# Altium PCB LowerMachine.PcbDoc
Units mil, origin at the board's own origin, x right, y up, seen from the top; angles counter-clockwise.
Board outline 1968.5 x 1968.5 mil, 2 copper layers (Top Layer, Bottom Layer); 46 components, 59 nets, 207 pads, 48 vias.
Unrouted connection lines stored in the file: 39.
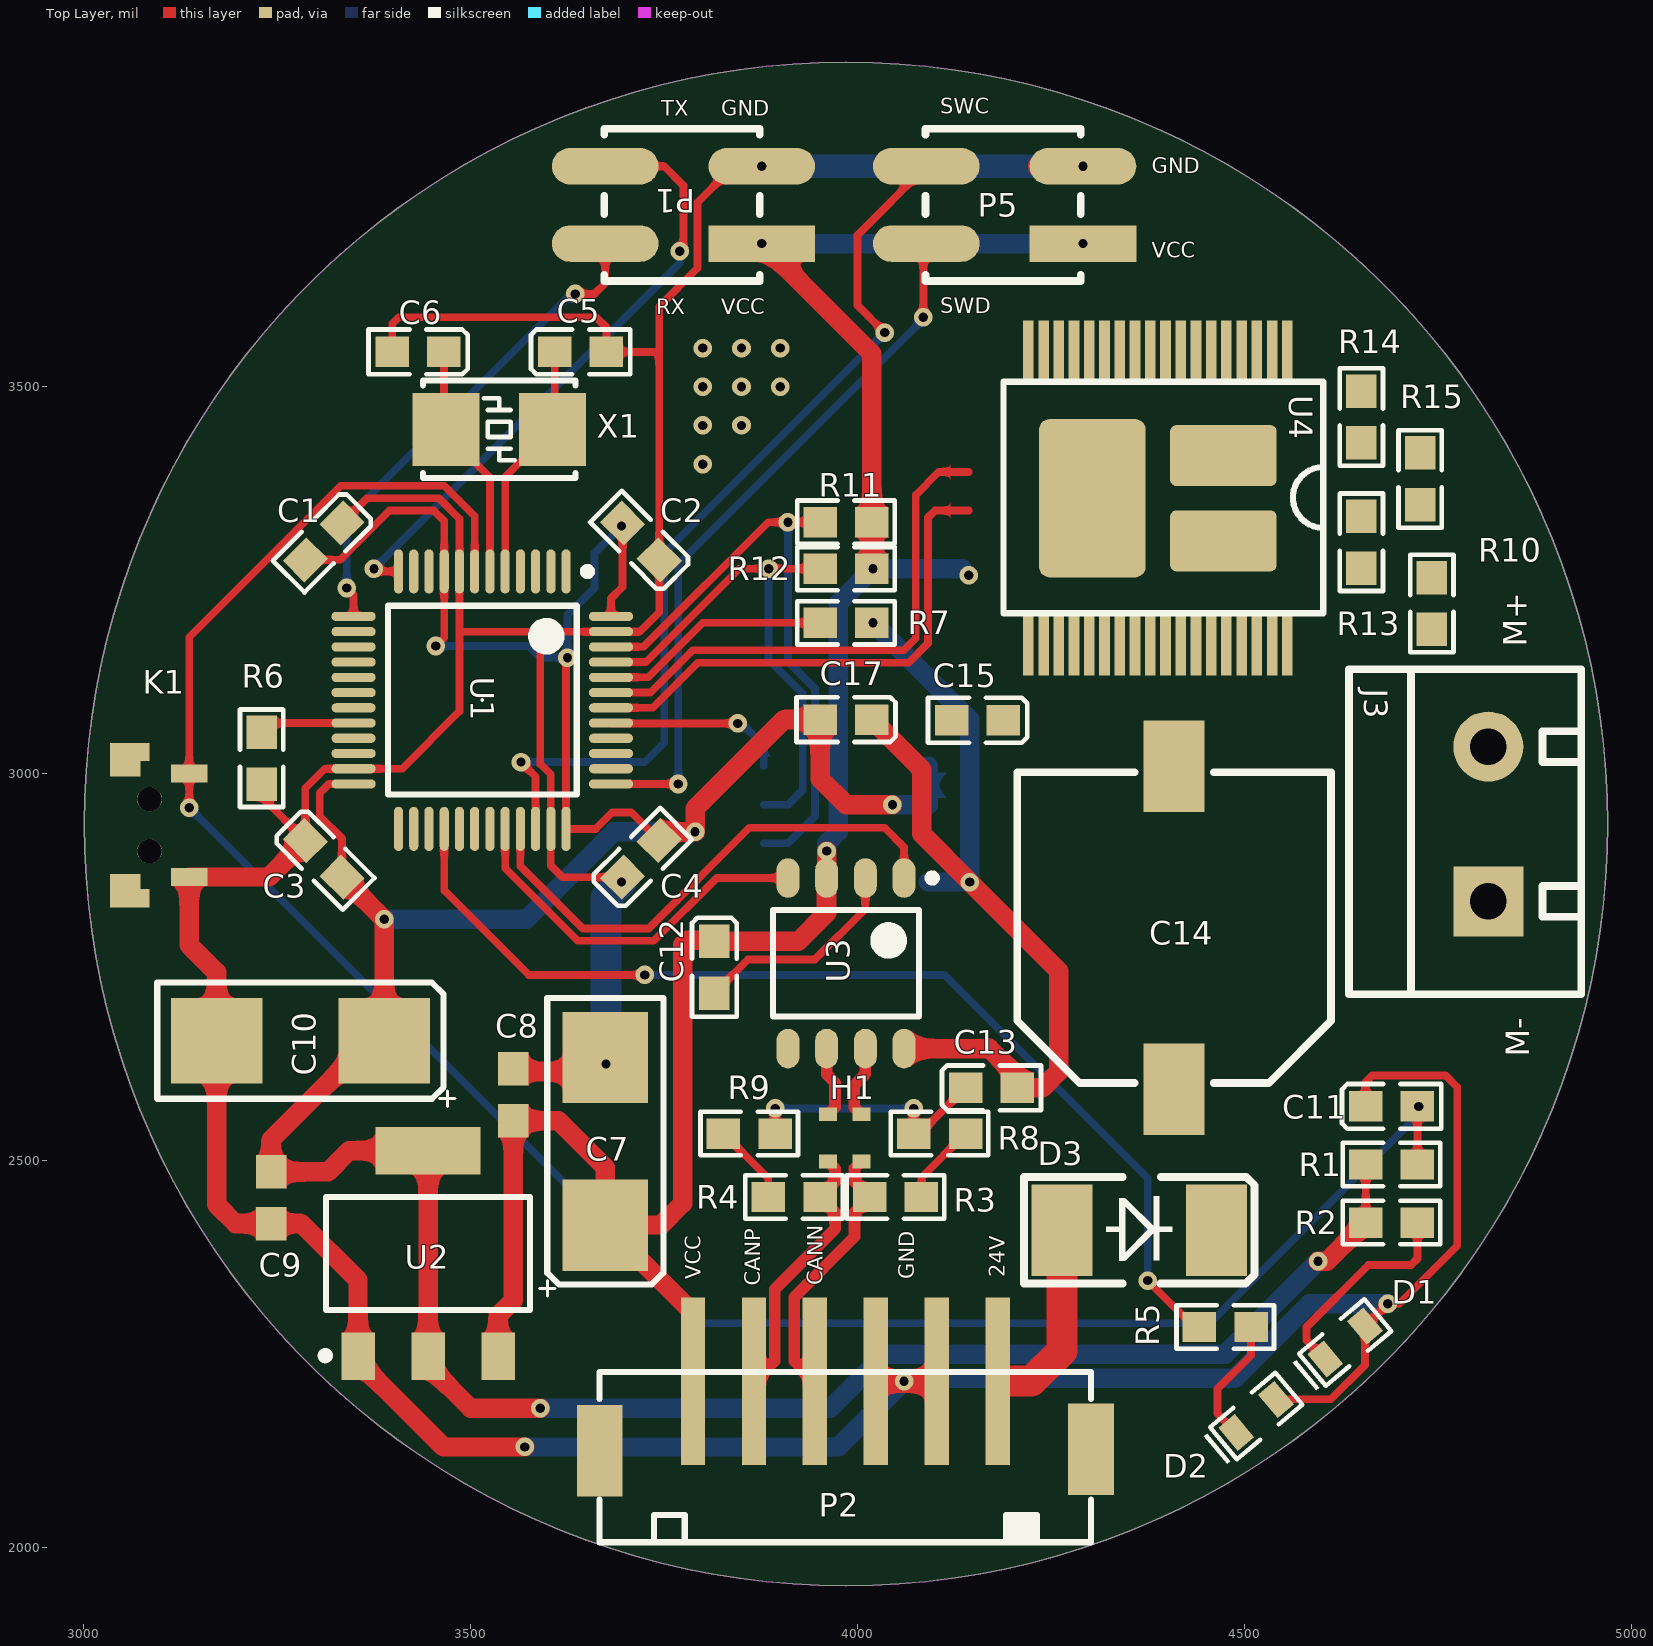
[diagram p0: Top Layer view]
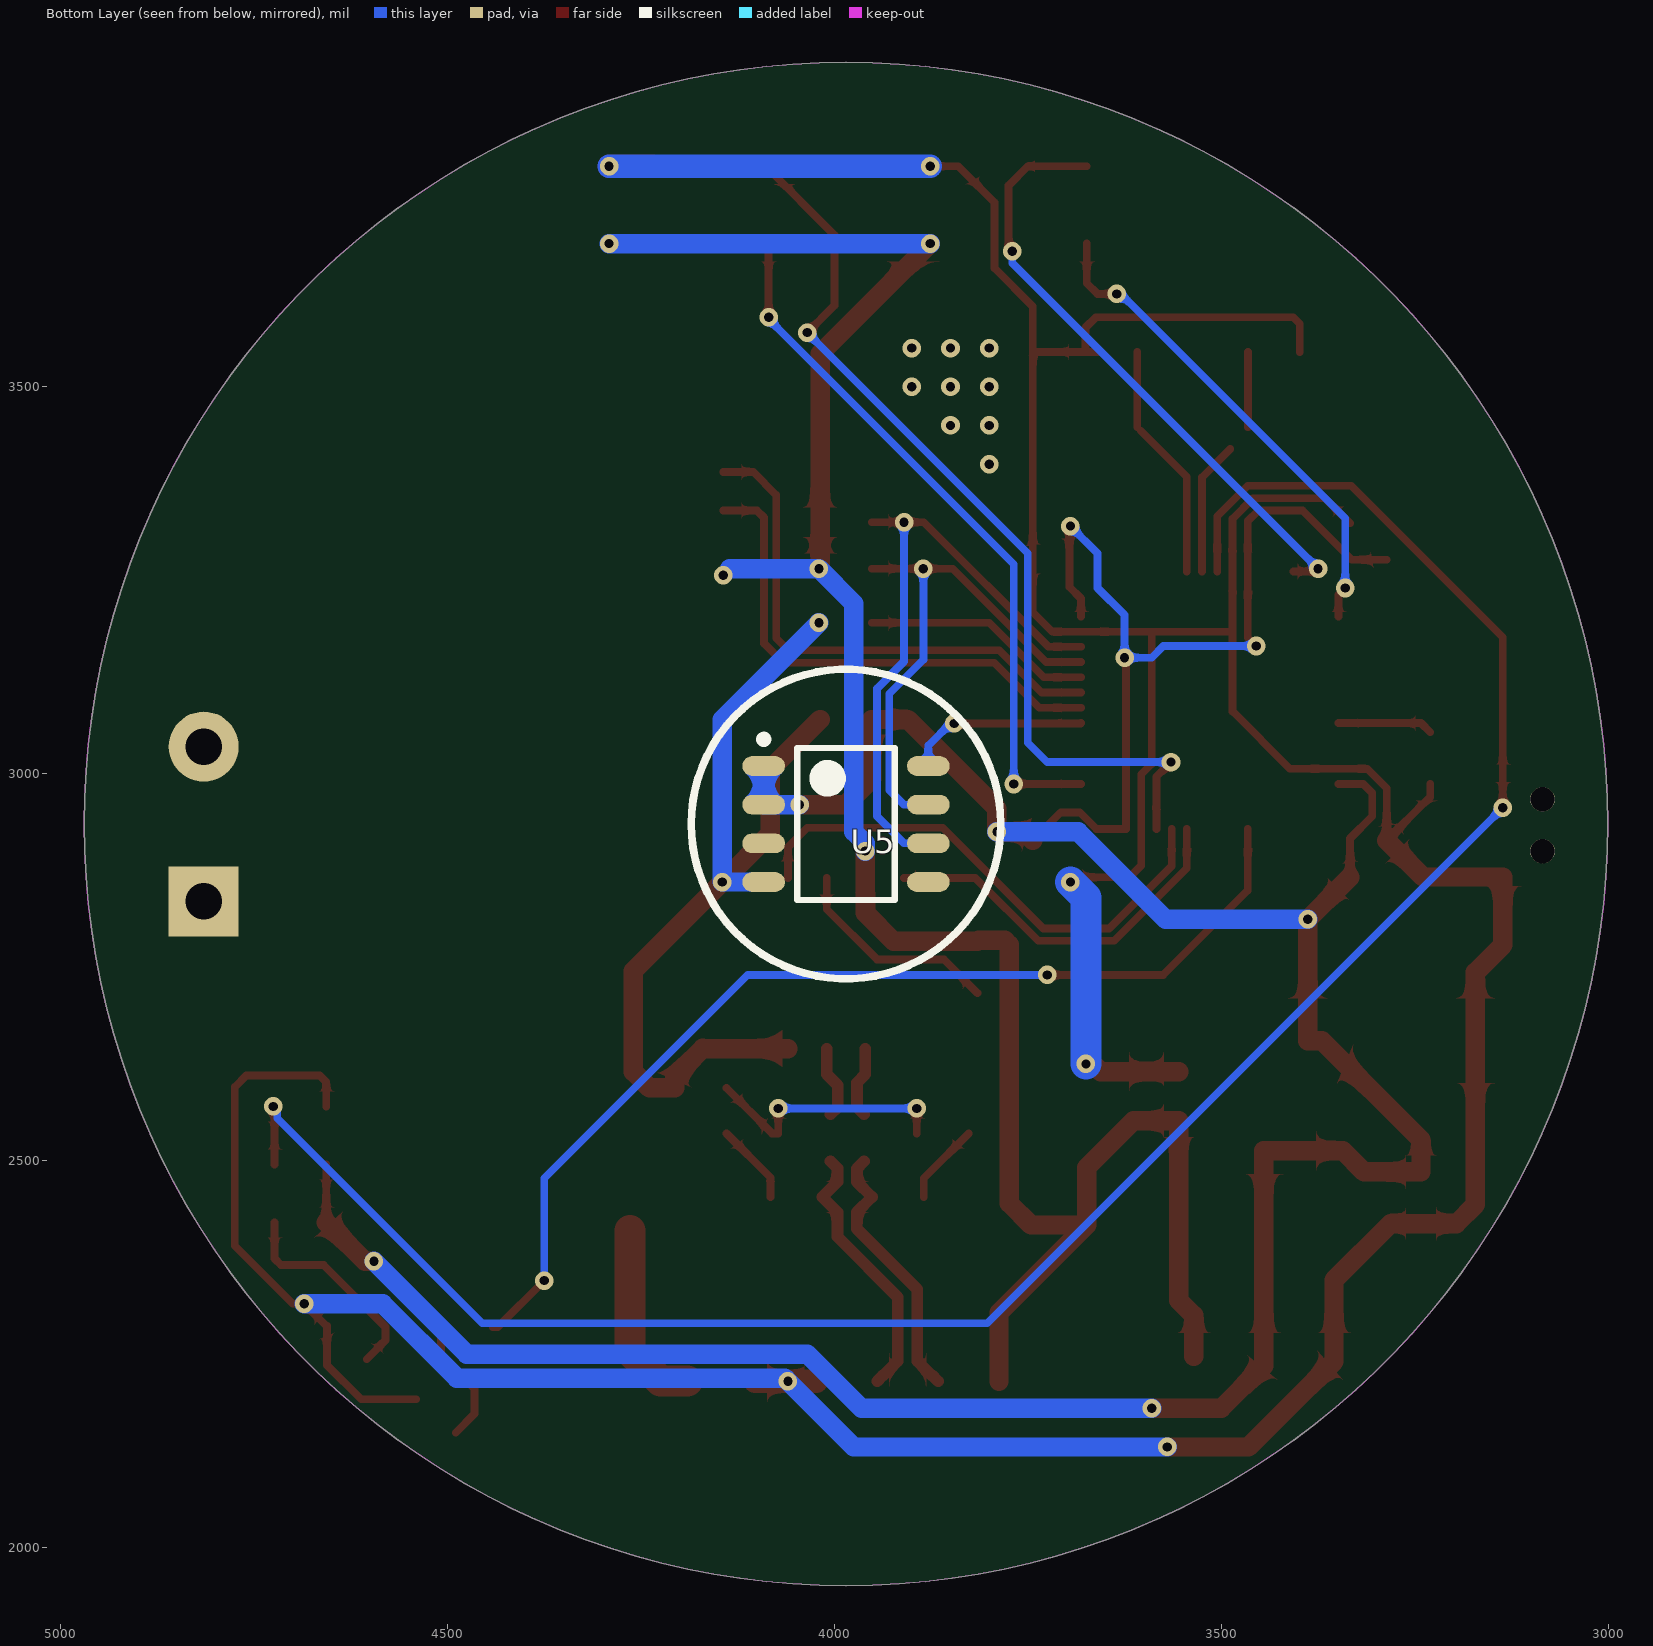
[diagram p1: Bottom Layer view, seen from below]

## Layer stack, top to bottom
Top Solder: solder mask 0.4, Solder Resist, Dk 3.5
Top Layer: signal copper 1.4
Dielectric 1: dielectric 12.6, FR-4, Dk 4.8
Bottom Layer: signal copper 1.4
Bottom Solder: solder mask 0.4, Solder Resist, Dk 3.5

## Board outline
3000.75,2935 ccw(c3985,2935) 3985,1950.75 ccw(c3985,2935) 4969.25,2935 ccw(c3985,2935) 3985,3919.25 ccw(c3985,2935)

## Design rules (kind name [scope] priority, off if disabled: settings)
Clearance [All] p1: gap=5
DiffPairsRouting [All] p1: maxlimit=10 minlimit=10 mostfreqgap=10 toplayer_minwidth=15 toplayer_maxwidth=15 toplayer_prefwidth=15 bottomlayer_minwidth=15 bottomlayer_maxwidth=15 bottomlayer_prefwidth=15 maxuncoupledlength=500
PolygonConnect [All] p1: connectstyle=Relief reliefconductorwidth=10 reliefentries=4 polygonreliefangle="90 Angle" airgapwidth=10
RoutingVias [All] p1: holewidth=28 width=50 viastyle="Through Hole" minholewidth=28 minwidth=50 maxholewidth=28 maxwidth=50
SolderMaskExpansion [All] p1: expansion=4
Width [All] p1: maxlimit=40 minlimit=6 preferedwidth=10
29 further rules are at their usual default settings.

## Classes and differential pairs
differential pair IN: +IN_P -IN_N
differential pair CAN: +CAN_P -CAN_N

## Components (designator, comment, footprint, x,y, rotation, side; value= is the part's Value field where it differs from the comment)
C1 "104" Cap-0603 3310,3300 r225 top
C2 "104" Cap-0603 3720,3300 r135 top
C3 "104" Cap-0603 3310,2890 r315 top
C4 "104" Cap-0603 3720,2890 r45 top
C5 "22pf" Cap-0603 3642,3545 r0 top
C6 "22pf" Cap-0603 3432,3545 r180 top
C7 "100uf" tan_cap_C 3674,2525 r90 top
C8 "104" Cap-0603-M 3555,2585 r270 top
C9 "104" Cap-0603-M 3242,2452 r90 top
C10 "100uf" tan_cap_C 3280,2655 r180 top
C11 "105" Cap-0603 4690,2570 r0 top
C12 "104" Cap-0603 3815,2750 r270 top
C13 "100nf" Cap-0603 4173,2594 r0 top
C14 "35v 470uf" CAPE_G_10X10.3X10.2 4409,2801 r270 top
C15 "10nf" Cap-0603 4155,3069 r180 top
C17 "100nf" Cap-0603 3985,3070 r180 top
D1 "LED_SMD_BLUE" LED_0603_B 4630,2265 r40 top
D2 "LED_SMD_WHITE" LED_0603_W 4515,2170 r40 top
D3 "1N5824" DO-214AC/SMA 4269,2410 r0 top
H1 "共模扼流圈" 共模扼流圈 4005,2560 r270 top
J3 "Motor interface" KF301-5.0-2P 4815,2835 r90 top
K1 "KEY" SW-SMD-2X4 3085,2900 r90 top
P1 "Header_2X2" Header_SMD_2.54X2 3775,3735 r90 top
P2 "PH2.0-6P" PH2.0S-6P 4181,2215 r180 top
P5 "Header_2X2" Header_SMD_2.54X2 4190,3735 r90 top
R1 "10K" Res-0603 4690,2495 r0 top
R2 "470R" Res-0603 4690,2420 r0 top
R3 "60R" Res-0603 4049,2453 r0 top
R4 "60R" Res-0603 3918,2453 r0 top
R5 "470" Res-0603 4475,2285 r0 top
R6 "10K" Res-0603 3230,3020 r270 top
R7 "10K" Res-0603 3985,3195 r180 top
R8 "0R" Res-0603 4106,2535 r180 top
R9 "0R" Res-0603 3860,2535 r180 top
R10 "4.7K" Res-0603 4742,3220 r90 top
R11 "4.7K" Res-0603 3985,3325 r180 top
R12 "4.7K" Res-0603 3985,3265 r180 top
R13 "10K" Res-0603 4651,3299 r90 top
R14 "4.7K" Res-0603 4651,3461 r270 top
R15 "4.7K" Res-0603 4727,3381 r270 top
U1 "stm32f103c8t6" stm32f103c8t6 3515,3095 r270 top
U2 "AMS1117" AMS1117 3445,2380 r0 top
U3 "tja1050" tja1050 3985,2755 r270 top
U4 "VNH5180A-E" *SSO-36 4388,3356 r270 top
U5 "AS5600" AS5600 3985,2935 r180 bottom
X1 "XTAL-2P" "OSC 5032-2P" 3537,3445 r0 top

## Footprints (in the part's own frame and the unit in brackets; to place one, negate y for a bottom-side part, rotate by r counter-clockwise, add the part's x,y. Pads: shape width x height; smd on the part's side, far side on the other; paste and mask are expansions set on the pad)
*SSO-36 [mm]
  rect 2x0.35 smd: 1(-4.825,4.25) 2(-4.825,3.75) 3(-4.825,3.25) 4(-4.825,2.75) 5(-4.825,2.25) 6(-4.825,1.75) 7(-4.825,1.25) 8(-4.825,0.75) 9(-4.825,0.25) 10(-4.825,-0.25) 11(-4.825,-0.75) 12(-4.825,-1.25) 13(-4.825,-1.75) 14(-4.825,-2.25) 15(-4.825,-2.75) 16(-4.825,-3.25) 17(-4.825,-3.75) 18(-4.825,-4.25) 19(4.825,-4.25) 20(4.825,-3.75) 21(4.825,-3.25) 22(4.825,-2.75) 23(4.825,-2.25) 24(4.825,-1.75) 25(4.825,-1.25) 26(4.825,-0.75) 27(4.825,-0.25) 28(4.825,0.25) 29(4.825,0.75) 30(4.825,1.25) 31(4.825,1.75) 32(4.825,2.25) 33(4.825,2.75) 34(4.825,3.25) 35(4.825,3.75) 36(4.825,4.25)
  rrect20% 2x3.5 smd: 2(-1.4,2.15) 35(1.4,2.15)
  rrect20% 5.2x3.5 smd: 13(0,-2.15)
  silkscreen extent -3.82,-5.07 3.78,5.43, body extent -5.21,-5.15 5.09,5.15, height 2.47
AMS1117 [mm]
  rect 1.1x1.55 smd: 1(-2.3,-3.375) 2(0,-3.375) 3(2.3,-3.375)
  rect 3.45x1.55 smd: 4(0,3.375)
  silkscreen extent -3.5,-3.48 3.35,1.85, body extent -3.25,-3.48 3.25,3.48, height 1.7
AS5600 [mm] "SOIC, 8-Leads, Body 4.90x3.90mm, Pitch 1.27mm, Thermal Pad 0.00x0.00mm, IPC Medium Density"
  oval 1.4x0.65 smd: 1(-2.7,1.905) 2(-2.7,0.635) 3(-2.7,-0.635) 4(-2.7,-1.905) 5(2.7,-1.905) 6(2.7,-0.635) 7(2.7,0.635) 8(2.7,1.905)
  silkscreen extent -2.83,-2.5 1.6,2.9, body extent -2,-2.5 2,2.5, height 1.75
Cap-0603 [mm]
  rect 1.1x1 smd: 1(-0.85,0) 2(0.85,0)
  silkscreen extent -1.63,-0.74 1.63,0.74, body extent -0.8,-0.4 0.8,0.4, height 0.6
Cap-0603-M [mm]
  rect 1.1x1 smd: 1(-0.85,0) 2(0.85,0)
  body extent -0.8,-0.4 0.8,0.4, height 0.6
CAPE_G_10X10.3X10.2 [mm]
  rect 3x2 smd: 1(5.3,0) 2(-5.3,0)
  silkscreen extent -5.1,-5.15 5.1,5.15, body extent -5.8,-5.15 5.8,5.15, height 10.2
DO-214AC/SMA [mm] "塑封二极管"
  rect 2x3 smd: A(-0.127,0) K(4.953,0)
  silkscreen extent -1.37,-1.75 6.2,1.75, body extent 0.11,-1.35 4.71,1.35, height 2.4
Header_SMD_2.54X2 [mm]
  rect 1.2x3.5 smd: 1(-1.27,-2.57)
  oval 1.2x3.5 smd: 2(1.27,-2.57) 3(1.27,2.57) 4(-1.27,2.57)
  silkscreen extent -2.5,-2.5 2.5,2.6, body extent -2.58,-3.75 2.5,3.75, height 9.7
KF301-5.0-2P [mm] "可拼接端子/6A"
  rect 2.3x2.3 hole 1.2: 1(0,0)
  round 2.3 hole 1.2: 2(5.08,0)
  silkscreen extent -3.05,-3.05 7.62,4.57, body extent -3,-3.09 7.5,4.51, height 10.05
LED_0603_B [mm]
  rect 0.7x1 smd: 1(-0.85,0) 2(0.85,0)
  silkscreen extent -1.75,-0.69 1.4,0.69, body extent -0.8,-0.42 0.8,0.38, height 0.61
LED_0603_W [mm]
  rect 0.7x1 smd: 1(-0.85,0) 2(0.85,0)
  silkscreen extent -1.75,-0.69 1.4,0.69, body extent -0.8,-0.42 0.8,0.38, height 0.61
"OSC 5032-2P" [mm]
  rect 2.2x2.4 smd: 1(-1.75,0) 2(1.75,0)
  silkscreen extent -2.5,-1.6 2.5,1.6, body extent -2.5,-1.52 2.5,1.68, height 0.86
PH2.0S-6P [mm]
  rect 1.5x3 smd: 0(-3.064,2.238) 0(13.064,2.286)
  rect 0.8x5.5 smd: 1(0,0) 2(2,0) 3(4,0) 4(6,0) 5(8,0) 6(10,0)
  silkscreen extent -3.06,-0.3 13.06,5.29, body extent -3,-2.5 13,5.3, height 6.15
Res-0603 [mm]
  rect 1.1x1 smd: 1(-0.85,0) 2(0.85,0)
  silkscreen extent -1.6,-0.71 1.6,0.71, body extent -0.8,-0.4 0.8,0.4, height 0.38
stm32f103c8t6 [mm] "QFP, 100-Leads, Body 14.00x20.00mm, Pitch 0.65mm, IPC Medium Density"
  oval 1.45x0.3 smd: 1(-4.225,2.75) 2(-4.225,2.25) 3(-4.225,1.75) 4(-4.225,1.25) 5(-4.225,0.75) 6(-4.225,0.25) 7(-4.225,-0.25) 8(-4.225,-0.75) 9(-4.225,-1.25) 10(-4.225,-1.75) 11(-4.225,-2.25) 12(-4.225,-2.75) 25(4.225,-2.75) 26(4.225,-2.25) 27(4.225,-1.75) 28(4.225,-1.25) 29(4.225,-0.75) 30(4.225,-0.25) 31(4.225,0.25) 32(4.225,0.75) 33(4.225,1.25) 34(4.225,1.75) 35(4.225,2.25) 36(4.225,2.75)
  oval 0.3x1.45 smd: 13(-2.75,-4.225) 14(-2.25,-4.225) 15(-1.75,-4.225) 16(-1.25,-4.225) 17(-0.75,-4.225) 18(-0.25,-4.225) 19(0.25,-4.225) 20(0.75,-4.225) 21(1.25,-4.225) 22(1.75,-4.225) 23(2.25,-4.225) 24(2.75,-4.225) 37(2.75,4.225) 38(2.25,4.225) 39(1.75,4.225) 40(1.25,4.225) 41(0.75,4.225) 42(0.25,4.225) 43(-0.25,4.225) 44(-0.75,4.225) 45(-1.25,4.225) 46(-1.75,4.225) 47(-2.25,4.225) 48(-2.75,4.225)
  silkscreen extent -4.35,-3.1 3.1,3.58, body extent -3.5,-3.5 3.5,3.5, height 1.6
SW-SMD-2X4 [mm]
  rect 0.6x1.3 smd: 0(-1.55,0.65) 0(3.25,0.65)
  rect 0.6x1 smd: 0(-1.05,0.8) 0(2.75,0.8)
  round 0.8 hole 0.8: 0(0,0) 0(1.7,0)
  rect 0.6x1.2 smd: 1(-0.85,-1.3) 3(2.55,-1.3)
  body extent -2.97,-1.8 4.83,1.8, height 3.5
tan_cap_C [mm]
  rect 3x2.8 smd: 1(-2.75,0) 2(2.75,0)
  silkscreen extent -5.08,-1.91 4.7,2.16, body extent -3.15,-1.6 3.15,1.6, height 2.5
tja1050 [mm] "SOP, 8-Leads, Body 4.90x3.90mm, Pitch 1.27mm, IPC Medium Density"
  oval 1.3x0.75 smd: 1(-2.8,1.905) 2(-2.8,0.635) 3(-2.8,-0.635) 4(-2.8,-1.905) 5(2.8,-1.905) 6(2.8,-0.635) 7(2.8,0.635) 8(2.8,1.905)
  silkscreen extent -2.92,-2.4 1.75,2.96, body extent -1.9,-2.4 1.9,2.4, height 1.75
共模扼流圈 [mm]
  rect 0.45x0.6 smd: 1(0,0) 2(0,-1.1) 3(1.55,-1.1) 4(1.55,0)

## Part data
C1 C2 C3 C4 C5 C6 C8 C9 C11 C12 C13: library part CAP
C7 C10: library part tan_cap
C14: library part CAPE-SMD, "贴片电解电容"
C15 C17: library part CAP, "贴片陶瓷电容"
D1 D2: "发光二极管"
D3: library part DIODE, "普通二极管"
J3: library part KF301-2P
R1 R2 R3 R4 R5 R6 R7 R8 R9 R10 R11 R12 R13 R14 R15: library part RES, "贴片电阻"
U4: "Automotive fully integrated H-bridge motor driver"
X1: "2脚无源脚晶振"

## Via types
v1: diameter 24, hole 12, Top Layer to Bottom Layer, 48 vias

## Nets (pads, with @x,y where several pads share a name; then routed paths per layer and width w, separated by ;. In a path a pad name is that pad's centre, name@x,y a point inside that pad or via, vN(x,y) a via of type N, cw(c..) or ccw(c..) an arc to the next point about the centre after c; other vN are vias at no path point)
3.3V: C1.2 C2.2 C3.2 C4.2 C9.2 C10.1 C17.2 R1.1 R2.1 U1.9 U1.24 U1.36 U1.48 U2.2 U2.4 U5.1 U5.2 | length 4809.4
  Top Layer w10: C1.2 3331.34,3276.34 3395,3340 3452.37,3340 3465.79,3326.59 U1.9 3465.79,3175.79 v1(3455,3165) ; C3.2 3333.66,2916.34 3305,2945 3305,2975 3316.73,2986.73 U1.24 ; v1(3625,3150) 3623.27,3148.27 U1.36 3661.66,2928.66 3683,2950 3707.33,2950 C4.2 ; U1.48 3681.34,3226.34 3696.34,3241.34 C2.2 ; R2.1 R1.1
  Top Layer w25: C3.2 v1(3388.27,2811.73) C10.1 3370,2655 3242,2527 C9.2 3315.46,2485.46 3342.87,2512.87 U2.4 U2.2 3445,2235 3500,2180 v1(3590,2180) ; C4.2 3755,2925 v1(3790,2925) 3790,2955 3905,3070 C17.2 3951.54,2993.46 3985,2960 v1(4045,2960) ; v1(4595,2370) 4606.54,2370 R2.1
  Bottom Layer w10: v1(3455,3165) 3575,3165 3590,3150 v1(3625,3150) 3625,3205 3660,3240 3660,3285 v1(3695,3320)
  Bottom Layer w25: v1(3388.27,2811.73) 3571.73,2811.73 3685,2925 v1(3790,2925) ; v1(3590,2180) 3965,2180 4035,2250 4475,2250 v1(4595,2370) ; v1(4045,2960) U5.2 U5.1
24V: C14.1 D3.K U4.24
ADC: R13.1 U1.11
BOOT0: R7.2 U1.44 | length 299.4
  Top Layer w10: U1.44 3729.27,3124.53 3799.75,3195 R7.2
BOOT1: R6.1 U1.20 | length 123.6
  Top Layer w10: R6.1 3242.01,3065.47 U1.20
CAN_N: H1.4 P2.4 R3.1 | length 347.7
  Top Layer w15: P2.4 3937.28,2222.5 3936.5,2222.5 3918,2241 3918,2323.64 3996,2401.64 3996,2433.46 R3.1 3996,2472.54 3996,2489.98 H1.4
CAN_P: H1.3 P2.5 R4.2 | length 348.1
  Top Layer w15: P2.5 3873.54,2222.5 3874.5,2222.5 3893,2241 3893,2334 3971,2412 3971,2433.46 R4.2 3971,2472.54 3971,2489.67 H1.3
CAN_RX: U1.32 U3.4 | length 488.8
  Top Layer w10: U1.32 3544.53,2877.85 3638.37,2784 3736.63,2784 3817.86,2865.24 U3.4
CAN_TX: U1.33 U3.1 | length 681.1
  Top Layer w10: U1.33 3564.21,2880.79 3645,2800 3730,2800 3860,2930 4035,2930 4060,2905 U3.1
GND: C1.1 C2.1 C3.1 C4.1 C5.2 C6.2 C7.2 C8.1 C9.1 C10.2 C11.1 C13.2 C14.2 C15.2 C17.1 D1.2 D2.2 K1.1 P1.2 P2.2 P2.3 P5.2 R6.2 R7.1 R15.1 U1.8 U1.23 U1.35 U1.47 U2.1 U3.8 U4.3 U4.4 U4.6 U4.20 U4.30 U4.31 U4.33 U4.34 U5.4 | length 7850.7
  Top Layer w10: R6.2 3230,2970 C3.1 3286.34,2981.34 3311.42,3006.42 U1.23 3411.42,3006.42 3485.47,3080.47 U1.8 3485.47,3329.53 3459,3356 3366,3356 C1.1 ; C6.2 3398.54,3581.54 3407,3590 3662,3590 3675.46,3576.54 C5.2 ; 3486.89,3183.58 U1.47 3718.58,3183.58 3743.66,3208.66 C2.1 3743.66,3540 ; 3590,3183.58 3590,3012.63 3603.58,2999.04 U1.35 3603.58,2881.42 3618.66,2866.34 C4.1 ; C5.2@3658.46,3545 3738.66,3545 3743.66,3540 ; v1(3876.18,3785) 3840,3785 3793,3738 3793,3653 3743.66,3603.66 3743.66,3540 ; D2.2 4611.52,2191.52 4655.64,2235.64 D1.2 4656.52,2286.52 v1(4685,2315) 4700,2315 4775,2390 4775,2595 4760,2610 4665,2610 4656.54,2601.54 C11.1
  Top Layer w25: C3.1 3239.21,2866.54 K1.1 3136.18,2778.82 3171.73,2743.27 C10.2 3171.73,2443.27 3196.46,2418.54 C9.1 3281.46,2418.54 3354.45,2345.55 U2.1 3354.45,2240.55 3465,2130 v1(3570,2130) ; C8.1@3555,2615 3655.73,2615 C7.2 ; C17.1 4083,3005.46 4083,2922 v1(4145,2860) 4260,2745 4260,2615 4239,2594 C13.2 4206.46,2608.54 4170,2645 4169.76,2644.76 U3.8
  Top Layer w30: P2.3 v1(4060,2215) P2.2 ; P5.2@4235,3785 v1(4291.18,3785)
  Bottom Layer w25: v1(3570,2130) 3975,2130 v1(4060,2215) 4064,2219 4487.84,2219 4583.84,2315 v1(4685,2315) ; v1(4020,3195) 4145,3070 v1(4145,2860) U5.4
  Bottom Layer w30: v1(3876.18,3785) v1(4291.18,3785)
  Bottom Layer w40: v1(3675,2625) 3675,2840 v1(3695,2860)
  other v1: 3800,3400 3800,3450 3850,3450 3800,3500 3850,3500 3900,3500 3800,3550 3850,3550 3900,3550
IN_N: H1.1 U3.7 | length 94.4
  Top Layer w15: H1.1 3995.85,2569.15 3995.85,2597.52 4010,2611.67 U3.7
IN_P: H1.2 U3.6 | length 93
  Top Layer w15: U3.6 3960,2611.67 3970.85,2600.83 3970.85,2569.15 H1.2
JTCK: P5.4 U1.37 | length 918
  Top Layer w10: U1.37 v1(3768.27,2986.73) ; v1(4085,3590) 4085,3681.18 P5.4
  Bottom Layer w10: v1(3768.27,2986.73) 3768.27,3270.74 4085,3587.47 v1(4085,3590)
JTMS: P5.3 U1.34 | length 1203.9
  Top Layer w10: v1(3565,3015) 3583.9,2996.1 U1.34 ; v1(4035,3570) 4000,3605 4000,3696.18 P5.3
  Bottom Layer w10: v1(3565,3015) 3725,3015 3750,3040 3750,3285 v1(4035,3570)
M+: J3.2 U4.2 U4.8
M-: J3.1 U4.29 U4.35
NetC12_2: C12.2 U3.2 | length 280.2
  Top Layer w10: C12.2 3858.46,2760 3945,2760 4010,2825 U3.2
NetC13_1: C13.1 R8.2 R9.1 | length 335.3
  Top Layer w10: R9.1 v1(3893.46,2567.46) ; R8.2@4072.46,2535.07 v1(4072.46,2567.46) ; R8.2 4080.54,2535 C13.1
  Bottom Layer w10: v1(3893.46,2567.46) v1(4072.46,2567.46)
NetC15_1: C15.1 R13.2 R15.2 U4.19
NetD1_1: D1.1 R2.2 | length 278.2
  Top Layer w10: D1.1 4580,2267.86 4580,2285 4660,2365 4715,2365 4723.46,2373.46 R2.2
NetD2_1: D2.1 R5.2 | length 164.6
  Top Layer w10: D2.1 4465,2172.86 4465,2205 4508.46,2248.46 R5.2
NetD3_A: D3.A P2.1 | length 246.2
  Top Layer w40: P2.1@4190,2215 4225,2215 4264,2254 D3.A
NetR3_2: R3.2 R8.1 | length 105.6
  Top Layer w10: R3.2 4082.46,2478 R8.1
NetR4_1: R4.1 R9.2 | length 106
  Top Layer w10: R9.2 3884.54,2477 R4.1
NetR14_2: R14.2 U4.21
NRST: C11.2 K1.3 R1.2 U1.7 | length 2819.2
  Top Layer w10: v1(3136.18,2956.18) K1.3 3136.18,3176.18 3332,3372 3465.63,3372 3505.16,3332.47 U1.7 ; R1.2 C11.2
  Bottom Layer w10: v1(3136.18,2956.18) 3802.36,2290 4455,2290 4720,2555 4720,2565 v1(4725,2570)
OSC8M_IN: C5.1 U1.5 X1.2 | length 303.8
  Top Layer w10: U1.5 3544.53,3383.63 X1.2@3604,3443.1 ; X1.2@3608.54,3447.64 C5.1
OSC8M_OUT: C6.1 U1.6 X1.1 | length 270.6
  Top Layer w10: X1.1@3465.46,3447.64 C6.1 ; X1.1@3488.46,3419.54 3524.84,3383.16 U1.6
OSC32_IN: U1.3
OSC32_OUT: U1.4
PA0: U1.10
PA2: P1.3 U1.12 | length 805.5
  Top Layer w10: v1(3375,3265) 3378.66,3261.34 U1.12 ; P1.3 3750,3785 3775,3760 3775,3680 v1(3770,3675)
  Bottom Layer w10: v1(3375,3265) 3770,3660 v1(3770,3675)
PA3: P1.4 U1.13 | length 641.2
  Top Layer w10: v1(3340,3240) 3348.66,3231.34 U1.13 ; v1(3635,3620) 3660,3620 3673.82,3633.82 P1.4
  Bottom Layer w10: v1(3340,3240) 3340,3330 3630,3620 v1(3635,3620)
PA4: U1.14
PA5: U1.15
PA6: U1.16
PA7: U1.17
PA8: U1.29
PA9: U1.30
PA10: U1.31
PA15: U1.38
PB0: U1.18
PB1: U1.19
PB3: U1.39
PB4: U1.40 U4.22
PB5: U1.41 U5.8 | length 236.1
  Top Layer w10: U1.41 3681.81,3065 v1(3845,3065)
  Bottom Layer w10: v1(3845,3065) 3849.05,3065 3849.53,3065.47 3878.7,3036.3 U5.8
PB6: U1.42 U4.17 | length 663.2
  Top Layer w10: U1.42 3735.16,3085.16 3793.5,3143.5 4066.13,3143.5 4091,3168.37 4091,3331 4100,3340 4143.7,3340
PB7: U1.43 U4.15 | length 688.8
  Top Layer w10: U1.43 3732.22,3104.84 3786.87,3159.5 4059.5,3159.5 4075,3175 4075,3360 4105,3390 4143.7,3390
PB8: R12.2 U1.45 U5.7 | length 682.6
  Top Layer w10: U1.45 3726.33,3144.21 3847.12,3265 v1(3885,3265) R12.2
  Bottom Layer w10: U5.7 3910,2960 3929,2979 3929,3103.37 3885,3147.37 v1(3885,3265)
PB9: R11.2 U1.46 U5.6 | length 812.2
  Top Layer w10: U1.46 3723.39,3163.9 3884.49,3325 v1(3910,3325) R11.2
  Bottom Layer w10: U5.6 3910,2910 3945,2945 3945,3110 3910,3145 v1(3910,3325)
PB10: U1.21
PB11: U1.22
PB12: U1.25
PB13: U1.26
PB14: U1.27
PB15: R5.1 U1.28 | length 1366.2
  Top Layer w10: U1.28 3465.79,2849.21 3575,2740 v1(3725,2740) ; v1(4375,2345) 4435,2285 R5.1
  Bottom Layer w10: v1(3725,2740) 4112,2740 4375,2477 v1(4375,2345)
PC13: U1.2
VBAT: U1.1
VCC: C7.1 C8.2 C12.1 P1.1 P2.6 P5.1 R10.2 R11.1 R12.1 R14.1 U2.3 U3.3 | length 2908.2
  Top Layer w25: U2.3 3535.55,2300 3555,2319.45 C8.2 3613.46,2551.54 3674,2491 C7.1 ; P2.6 3787.3,2303.43 C7.1 ; v1(3876.18,3685) 4018.46,3542.72 R11.1 R12.1 ; v1(3960,2900) U3.3 3960,2820 3923.5,2783.5 C12.1 C12.1 3813.46,2785 3780,2785 3774,2779 3774,2445 3745.73,2416.73 C7.1
  Bottom Layer w25: v1(3876.18,3685) v1(4291.18,3685) ; v1(3960,2900) 3960,2910 3975,2925 3975,3220 v1(4020,3265) 4135,3265
  other v1: 4143.7,3256.3
pads on no net: K1.0 P2.0 R10.1 U3.5 U4.1 U4.5 U4.7 U4.9 U4.10 U4.11 U4.12 U4.13 U4.14 U4.16 U4.18 U4.23 U4.25 U4.26 U4.27 U4.28 U4.32 U4.36 U5.3 U5.5

## Keep-outs
Keep-Out Layer:
  circle w0.5: c3985,2935 r984.25

## Silkscreen, mask and mechanical layers (free items; w line width, h text height)
Top Overlay:
  lines w5: 3392.95,3217.05 3392.95,3217.05 ; 3515,3095 3515,3095 ; 3637.05,2972.95 3637.05,2972.95
  text "SWC" at 4107,3853 h20
  text "TX" at 3746,3850 h20
  text "GND" at 3824,3850 h20
  text "GND" at 4380,3776 h20
  text "VCC" at 4380,3667 h20
  text "SWD" at 4107,3595 h20
  text "RX" at 3740,3594 h20
  text "VCC" at 3824,3594 h20
  text "M+" at 4865,3164 h30 r90
  text "M-" at 4868,2634 h30 r90
  text "24V" at 4190,2349 h20 r90
  text "VCC" at 3797,2347 h20 r90
  text "GND" at 4073,2347 h20 r90
  text "CANN" at 3955,2339 h20 r90
  text "CANP" at 3874,2338 h20 r90
Bottom Overlay:
  circle w10: c3985,2935 r200